# Altium PCB manual.pcbdoc
Units mm, origin at the board's own origin, x right, y up, seen from the top; angles counter-clockwise.
Board outline 75.97 x 73.9 mm, 2 copper layers (Top Layer, Bottom Layer); 19 components, 16 nets, 70 pads, 0 vias.
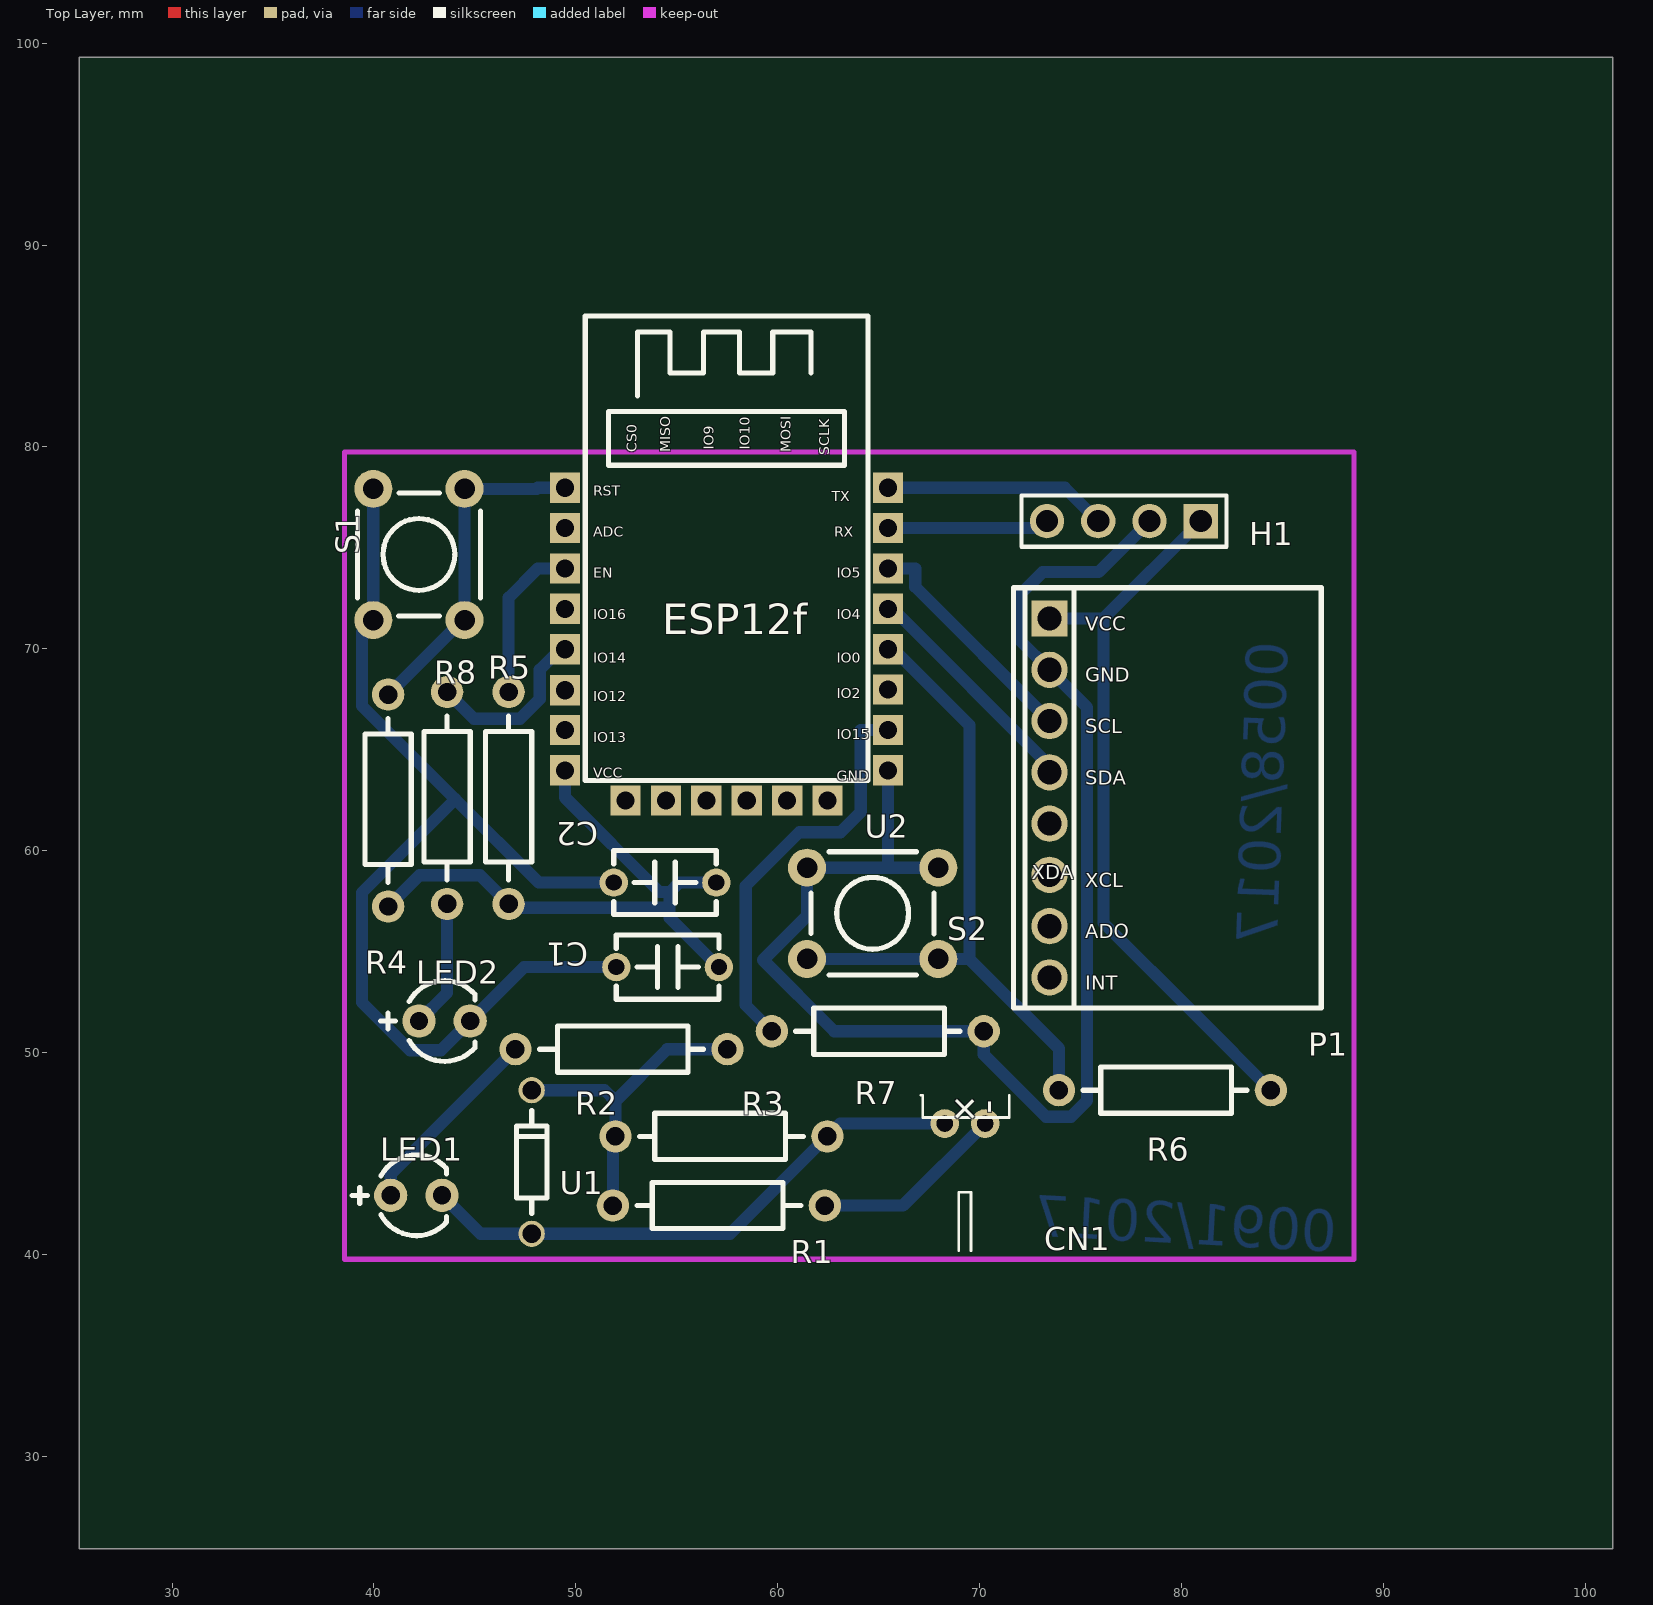
[diagram p0: Top Layer view]
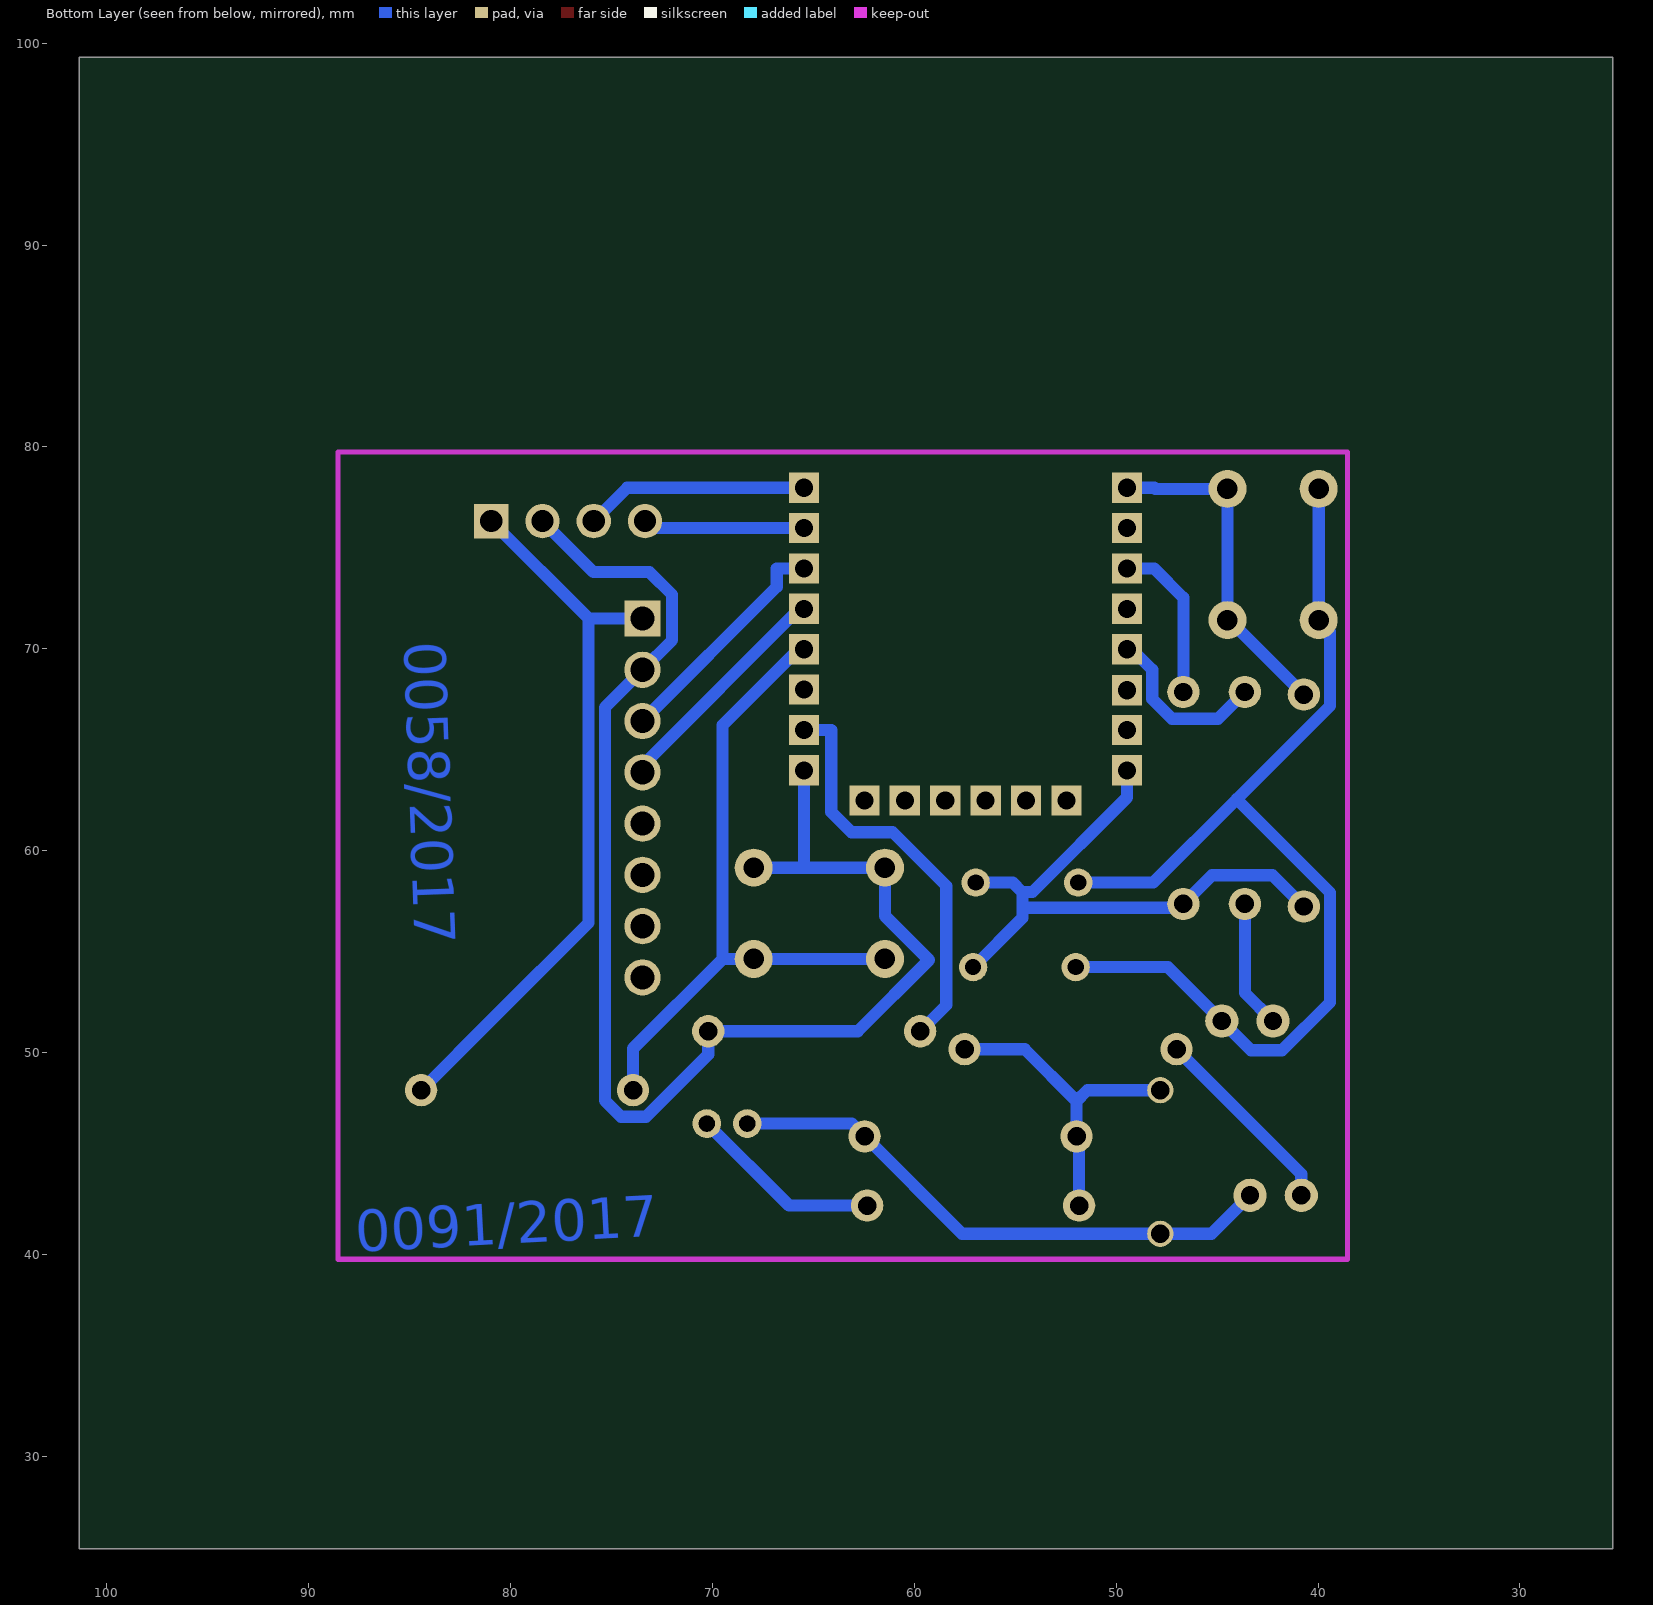
[diagram p1: Bottom Layer view, seen from below]

## Layer stack, top to bottom
Top Layer: signal copper (thickness not stored)
Dielectric: dielectric 0.32, FR-4, Dk 4.8
Bottom Layer: signal copper (thickness not stored)

## Board outline
101.372,25.4 25.4,25.4 25.4,99.303 101.372,99.303

## Components (designator, comment, footprint, x,y, rotation, side; value= is the part's Value field where it differs from the comment)
C1 "10uF" CAP-TH_L5.0-W2.5-P5.08-D0.7 54.546,54.225 r0 top
C2 "100nF" CAP-TH_L5.0-W2.5-P5.08-D0.7 54.419,58.416 r0 top
CN1 "JST_2PIN-THM-RA" JST-PH-2-THM-RA 69.278,46.478 r180 top
H1 "Header-Male-2.54_1x4_C59481" HDR-TH_4P-P2.54-V 77.153,76.323 r180 top
LED1 "204-10SUBC/C470/S400-A4" LED-TH_BD4.0-P2.54-FD 42.1,42.922 r0 top
LED2 "204-10SUBC/C470/S400-A4" LED-TH_BD4.0-P2.54-FD 43.497,51.558 r0 top
P1 "MPU6050" MPU6050 73.469,71.497 r270 top
R1 "1K" RES-TH_BD2.2-L6.5-P10.50-D0.6 57.087,42.414 r180 top
R2 "100" RES-TH_BD2.2-L6.5-P10.50-D0.6 52.261,50.161 r0 top
R3 "1.2K" RES-TH_BD2.2-L6.5-P10.50-D0.6 57.213,45.843 r180 top
R4 "1K" RES-TH_BD2.2-L6.5-P10.50-D0.6 40.703,62.48 r90 top
R5 "10K" RES-TH_BD2.2-L6.5-P10.50-D0.6 46.672,62.607 r90 top
R6 "10K" RES-TH_BD2.2-L6.5-P10.50-D0.6 79.184,48.129 r0 top
R7 "10K" RES-TH_BD2.2-L6.5-P10.50-D0.6 64.96,51.05 r0 top
R8 "100" RES-TH_BD2.2-L6.5-P10.50-D0.6 43.624,62.607 r90 top
S1 "TAC_SWITCH" TACTILE-PTH 42.227,74.672 r90 top
S2 "TAC_SWITCH" TACTILE-PTH 64.706,56.892 r180 top
U1 "DIODE-ZENER" DIODE-ZENER 47.816,44.573 r270 top
U2 "ESP12f" ESP12F 57.468,70.227 r0 top

## Footprints (in the part's own frame and the unit in brackets; to place one, negate y for a bottom-side part, rotate by r counter-clockwise, add the part's x,y. Pads: shape width x height; smd on the part's side, far side on the other; paste and mask are expansions set on the pad)
CAP-TH_L5.0-W2.5-P5.08-D0.7 [mm]
  round 1.4 hole 0.8: 1(-2.54,0) 2(2.54,0)
  silkscreen extent -2.54,-1.59 2.54,1.59
DIODE-ZENER [mil]
  round 51.2 hole 35.4: P$1(-140,0) P$2(140,0)
  silkscreen extent -100,-30 100,30
ESP12F [mm]
  rect 1.5x1.5 hole 0.899: 1(-8,7.75) 2(-8,5.75) 3(-8,3.75) 4(-8,1.75) 5(-8,-0.25) 6(-8.001,-2.286) 7(-8,-4.25) 8(-8,-6.25) 9(-5,-7.75) 10(-2.999,-7.75) 11(-1.001,-7.75) 12(1,-7.75) 13(3.001,-7.75) 14(5,-7.75) 15(8,-6.25) 16(8,-4.25) 17(8,-2.25) 18(8,-0.25) 19(8,1.75) 20(8,3.75) 21(8,5.75) 22(8,7.75)
  silkscreen extent -7,-6.76 7,16.25
HDR-TH_4P-P2.54-V [mm]
  rect 1.7x1.7 hole 1.1: 1(-3.81,0)
  round 1.7 hole 1.1: 2(-1.27,0) 3(1.27,0) 4(3.81,0)
  silkscreen extent -5.08,-1.27 5.08,1.27
JST-PH-2-THM-RA [mil]
  round 56 hole 31.5 slot 31.7 at 0 deg: 1(39.37,0) 2(-39.37,0)
  silkscreen extent -87,-55 87,248
LED-TH_BD4.0-P2.54-FD [mil]
  round 65 hole 35.43: 1(-50,0) 2(50,0)
  silkscreen extent -125,-79 59,79
MPU6050 [mm]
  rect 1.8x1.8 hole 1.2: 1(0,0)
  round 1.8 hole 1.2: 2(2.54,0) 3(5.08,0) 4(7.62,0) 5(10.16,0) 6(12.7,0) 7(15.24,0) 8(17.78,0)
  silkscreen extent -1.52,-1.78 19.3,13.46
RES-TH_BD2.2-L6.5-P10.50-D0.6 [mm]
  round 1.6 hole 0.914: 1(-5.25,0) 2(5.25,0)
  silkscreen extent -4.06,-1.14 4.06,1.14
TACTILE-PTH [mil]
  round 74 hole 40: 1(-128,89) 2(128,89) 3(-128,-89) 4(128,-89)
  silkscreen extent -120,-120 120,120

## Nets (pads, with @x,y where several pads share a name; then routed paths per layer and width w, separated by ;. In a path a pad name is that pad's centre, name@x,y a point inside that pad or via, vN(x,y) a via of type N, cw(c..) or ccw(c..) an arc to the next point about the centre after c; other vN are vias at no path point)
+3V3: C1.2 C2.2 H1.1 P1.1 R4.1 R5.1 R6.2 U2.8 | length 67.3
  Bottom Layer w0.6: R4.1 42.253,58.779 45.251,58.779 R5.1 46.859,57.171 54.651,57.171 ; U2.8 49.468,62.626 54.154,57.94 54.651,57.94 ; C2.2 55.127,58.416 54.651,57.94 ; C1.2 54.651,56.661 54.651,57.171 ; P1.1 76.136,71.497 ; H1.1 76.136,71.497 ; R6.2 80.808,51.755 76.136,56.427 76.136,71.497 ; 54.651,57.171 54.651,57.94
+5V: R1.2 R2.2 R3.2 U1.P$1 | length 16.2
  Bottom Layer w0.6: U1.P$1 51.427,48.129 51.964,47.592 ; R1.2 51.837,45.716 R3.2 51.964,47.592 ; R2.2 54.532,50.161 51.964,47.592
CN1_1: CN1.1 LED1.2 R3.1 U1.P$2 | length 28
  Bottom Layer w0.6: LED1.2 45.276,41.017 U1.P$2 57.638,41.017 R3.1 63.099,46.478 CN1.1
GND: C1.1 C2.1 H1.2 LED2.2 P1.2 R7.2 S1.1 S1.2 S2.3 S2.4 U2.15 | length 125.8
  Bottom Layer w0.6: S1.2 S1.1 39.402,70.856 39.402,67.178 44.034,62.546 ; C2.1 48.164,58.416 44.034,62.546 ; C1.1 47.434,54.225 LED2.2 43.317,50.108 41.782,50.108 39.402,52.488 39.402,57.913 44.034,62.546 ; U2.15 65.467,59.152 ; S2.3 65.467,59.152 ; H1.2 75.894,73.794 73.121,73.794 72,72.674 72,70.426 P1.2 75.335,67.091 75.335,47.619 74.53,46.813 73.297,46.813 70.211,49.9 R7.2 62.804,51.05 59.275,54.579 61.455,56.759 S2.4 65.467,59.152
LED1_1: LED1.1 R2.1 | length 9.8
  Bottom Layer w0.6: LED1.1 40.831,43.981 R2.1
LED2_1: LED2.1 R8.1 | length 6.4
  Bottom Layer w0.6: LED2.1 43.625,52.955 R8.1
R1_1: CN1.2 R1.1 | length 9.6
  Bottom Layer w0.6: R1.1 66.214,42.414 CN1.2
RX: H1.3 U2.22 | length 11.1
  Bottom Layer w0.6: U2.22 74.229,77.976 H1.3
SCL: P1.3 U2.20 | length 11.7
  Bottom Layer w0.6: U2.20 66.818,73.976 66.818,73.068 P1.3
SDA: P1.4 U2.19 | length 11.5
  Bottom Layer w0.6: U2.19 65.698,71.976 73.469,64.204 P1.4
STATUS: R8.2 U2.5 | length 8.7
  Bottom Layer w0.6: R8.2 44.952,66.529 47.234,66.529 48.215,67.51 48.215,68.958 49.233,69.976 U2.5
TX: H1.4 U2.21 | length 8
  Bottom Layer w0.6: U2.21 72.996,75.976 H1.4
U2_1: R4.2 S1.3 S1.4 U2.1 | length 16.8
  Bottom Layer w0.6: R4.2 44.395,71.421 S1.3 S1.4 48.063,77.923 48.117,77.976 U2.1
U2_3: R5.2 U2.3 | length 8.1
  Bottom Layer w0.6: R5.2 46.673,72.532 48.117,73.976 U2.3
U2_16: R7.1 U2.16 | length 20.4
  Bottom Layer w0.6: R7.1 58.417,52.343 58.417,58.253 61.074,60.91 63.114,60.91 64.117,61.912 64.117,65.976 U2.16
U2_18: R6.1 S2.1 S2.2 U2.18 | length 33.6
  Bottom Layer w0.6: S2.2 S2.1 69.496,54.631 ; U2.18 65.738,69.976 69.496,66.219 69.496,54.631 ; R6.1 73.935,50.192 69.496,54.631
pads on no net: P1.5 P1.6 P1.7 P1.8 U2.2 U2.4 U2.6 U2.7 U2.9 U2.10 U2.11 U2.12 U2.13 U2.14 U2.17

## Other copper
Bottom Layer:
  text "0058/2017" at 85.28,70.318 h2.03 r88
  text "0091/2017" at 87.64,40.129 h2.03 r357

## Text inside footprints (layer, text, board x,y; h text height)
CN1: Top Overlay "+" at 68.29,47.36 h1.42 r315; Top Overlay "-" at 69.996,47.663 h1.42 r270
P1: Top Overlay "VCC" at 75.248,70.893 h0.7; Top Overlay "GND" at 75.248,68.353 h0.7; Top Overlay "SCL" at 75.248,65.813 h0.7; Top Overlay "SDA" at 75.248,63.273 h0.7; Top Overlay "XDA" at 72.581,58.574 h0.7; Top Overlay "XCL" at 75.248,58.193 h0.7; Top Overlay "ADO" at 75.248,55.653 h0.7; Top Overlay "INT" at 75.248,53.113 h0.7
U2: Top Overlay "RST" at 50.865,77.569 h0.5; Top Overlay "VCC" at 50.865,63.599 h0.5; Top Overlay "GND" at 62.93,63.472 h0.5; Top Overlay "RX" at 62.803,75.537 h0.5; Top Overlay "TX" at 62.676,77.315 h0.5; Top Overlay "SCLK" at 62.545,79.597 h0.5 r90; Top Overlay "MOSI" at 60.64,79.724 h0.5 r90; Top Overlay "IO10" at 58.608,79.851 h0.5 r90; Top Overlay "IO9" at 56.83,79.851 h0.5 r90; Top Overlay "MISO" at 54.671,79.724 h0.5 r90; Top Overlay "CS0" at 53.02,79.724 h0.5 r90; Top Overlay "IO15" at 62.93,65.504 h0.5; Top Overlay "IO2" at 62.93,67.536 h0.5; Top Overlay "IO0" at 62.93,69.314 h0.5; Top Overlay "IO4" at 62.93,71.473 h0.5; Top Overlay "IO5" at 62.93,73.505 h0.5; Top Overlay "EN" at 50.865,73.505 h0.5; Top Overlay "IO13" at 50.865,65.377 h0.5; Top Overlay "IO12" at 50.865,67.409 h0.5; Top Overlay "IO14" at 50.865,69.314 h0.5; Top Overlay "IO16" at 50.865,71.473 h0.5; Top Overlay "ADC" at 50.865,75.537 h0.5